# Altium PCB C2Sv0 - Adaptor.PcbDoc
Units mm, origin at the board's own origin, x right, y up, seen from the top; angles counter-clockwise.
Board outline 18.5 x 30 mm, 2 copper layers (Top Layer, Bottom Layer), stack 1.57 mm thick; 6 components, 13 nets, 74 pads, 24 vias.
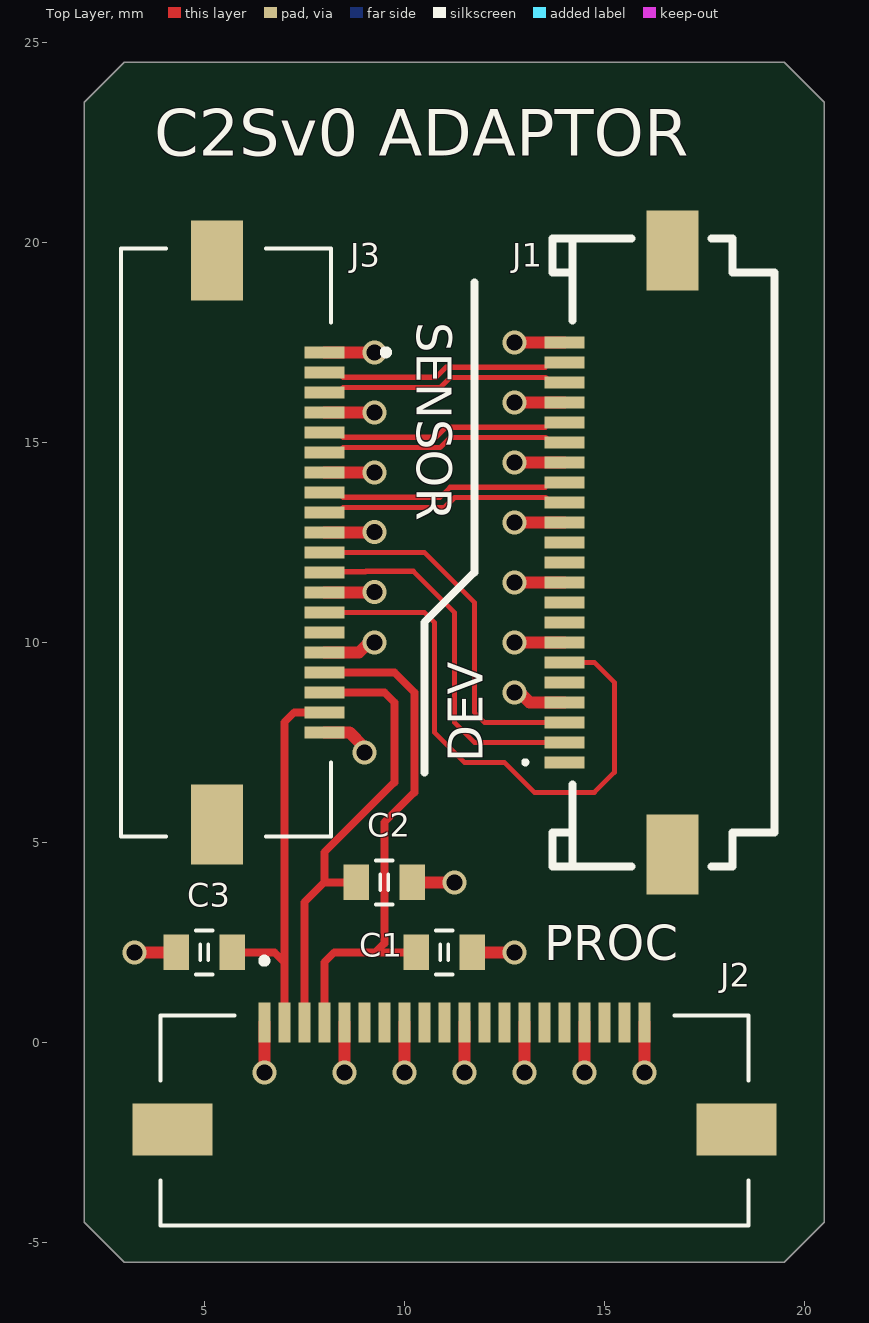
[diagram p0: Top Layer view]
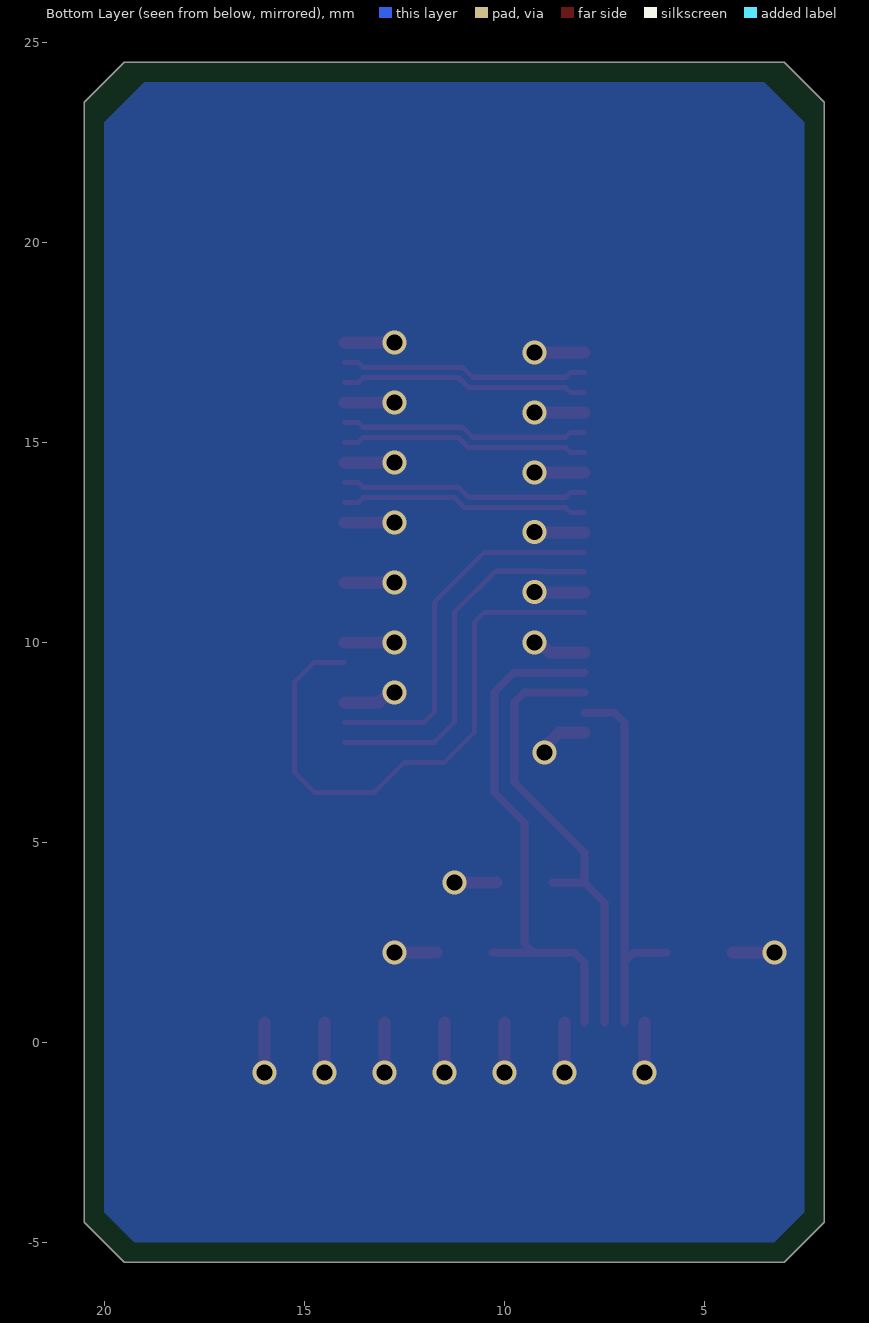
[diagram p1: Bottom Layer view, seen from below]
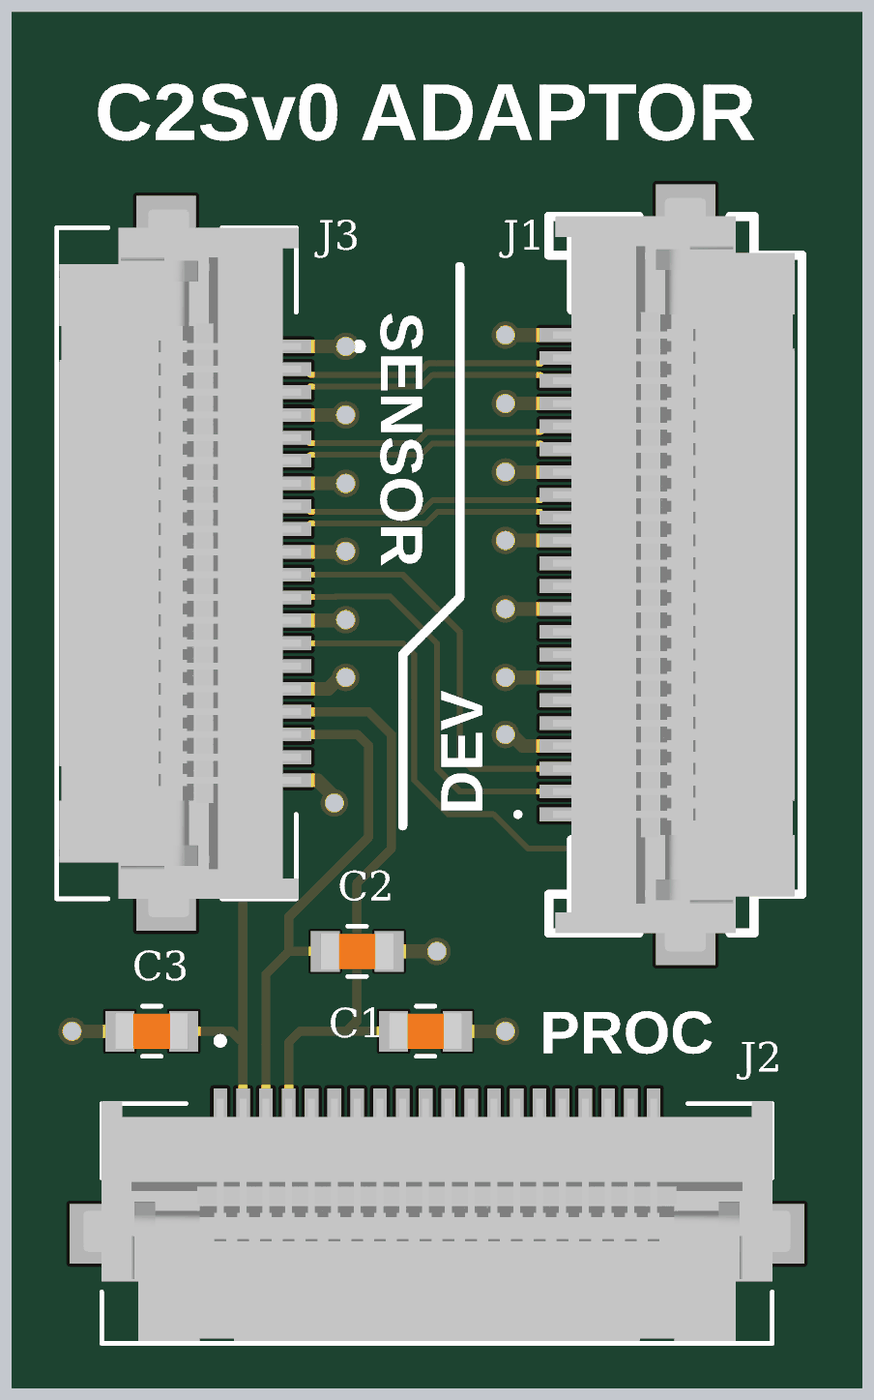
[diagram p2: 3D render of the assembled board from above, using the file's embedded part models]

## Layer stack, top to bottom
Top Solder: solder mask 0.0127, Solder Resist, Dk 3.8
Top Layer: signal copper 0.035
Dielectric: core 1.5, FR-4, Dk 4.5
Bottom Layer: signal copper 0.035
Bottom Solder: solder mask 0.0127, Solder Resist, Dk 3.8

## Board outline
2,-4.5 2,23.5 3,24.5 19.5,24.5 20.5,23.5 20.5,-4.5 19.5,-5.5 3,-5.5

## Design rules (kind name [scope] priority, off if disabled: settings)
BoardOutlineClearance [All] p1: gap=0.2 ignorepadtopadclearanceinfootprint=FALSE
Clearance [All] p1: gap=0.127 ignorepadtopadclearanceinfootprint=TRUE except(0.25: Arc-Hole Track-Hole SMDPad-Hole THPad-Hole Via-Hole Fill-Hole Poly-Hole Region-Hole Text-Hole)
ComponentClearance [All] p1: gap=0.127 collisioncheckmode=3 verticalgap=0.127 showdistances=TRUE
DiffPairsRouting [All] p1: maxlimit=0.254 minlimit=0.127 mostfreqgap=0.127 toplayer_minwidth=0.127 toplayer_maxwidth=25.4 toplayer_prefwidth=0.127 bottomlayer_minwidth=0.127 bottomlayer_maxwidth=25.4 bottomlayer_prefwidth=0.127 maxuncoupledlength=12.7
Height [All] p1: minheight=0 maxheight=1816.048 prefheight=12.7
HoleSize [All] p1: absolutevalues=TRUE maxlimit=6.3 minlimit=0.3 maxpercent=80.000 minpercent=20.000
HoleToHoleClearance [All] p1: gap=0.25 allowstackedmicrovias=FALSE
MinimumAnnularRing [All] p1: minimumring=0.076
MinimumSolderMaskSliver [All] p1: minsoldermaskwidth=0
PlaneClearance [All] p1: clearance=0.127
PlaneConnect PlaneConnectPowerPads [InPadClass('PowerPads')] p1: planeconnectstyle=Direct reliefexpansion=0.508 reliefentries=4 reliefconductorwidth=0.254 reliefairgap=0.254
PlaneConnect [All] p2: pad.planeconnectstyle=Relief pad.reliefexpansion=0.3 pad.reliefentries=4 pad.reliefconductorwidth=0.127 pad.reliefairgap=0.127 via.planeconnectstyle=Direct via.reliefexpansion=0.3 via.reliefentries=4 via.reliefconductorwidth=0.127 via.reliefairgap=0.127
PolygonConnect PolygonConnectPowerPads [All vs (InPadClass('PowerPads'))] p1: connectstyle=Direct reliefconductorwidth=0.254 reliefentries=4 polygonreliefangle="90 Angle" airgapwidth=0.254
PolygonConnect [All] p2: thpad.connectstyle=Relief thpad.reliefconductorwidth=0.127 thpad.reliefentries=4 thpad.polygonreliefangle="90 Angle" thpad.airgapwidth=0.127 smdpad.connectstyle=Relief smdpad.reliefconductorwidth=0.127 smdpad.reliefentries=4 smdpad.polygonreliefangle="90 Angle" smdpad.airgapwidth=0.127 via.connectstyle=Direct via.reliefconductorwidth=0.127 via.reliefentries=4 via.polygonreliefangle="90 Angle" via.airgapwidth=0.127
RoutingVias [All] p1: holewidth=0.3 width=0.6 viastyle="Through Hole" minholewidth=0.3 minwidth=0.6 maxholewidth=0.6 maxwidth=6.6
SilkToSilkClearance [All] p1: silktosilkclearance=0
SilkToSolderMaskClearance [IsPad] p1: minsilkscreentomaskgap=0.127 clearancetoexposedcopper=TRUE
SolderMaskExpansion SME_Via [IsVia] p1: expansion=0.102 istentingtop=TRUE
SolderMaskExpansion [All] p2: expansion=0.075 istentingtop=FALSE
SupplyNets "Schematic Supply Nets_3" [InNet('1V2')] p1: voltage=0.000
SupplyNets "Schematic Supply Nets_2" [InNet('GND')] p2: voltage=0.000
SupplyNets "Schematic Supply Nets_1" [InNet('1V8')] p3: voltage=0.000
SupplyNets "Schematic Supply Nets" [InNet('2V8')] p4: voltage=0.000
Width [All] p1: maxlimit=25.4 minlimit=0.127 preferedwidth=0.127 minimp=50.000000 maximp=50.000000 favimp=50.000000
20 further rules are at their usual default settings.

## Classes and differential pairs
differential pair STM_DATA1: +STM_DATA1_P -STM_DATA1_N
differential pair STM_DATA0: +STM_DATA0_P -STM_DATA0_N
differential pair STM_CLK: +STM_CLK_P -STM_CLK_N

## Components (designator, comment, footprint, x,y, rotation, side; value= is the part's Value field where it differs from the comment)
C1 "MCD-00237" C0603 11,2.25 r180 top value=0.1uF
C2 "MCD-00237" C0603 9.5,4 r180 top locked value=0.1uF
C3 "MCD-00237" C0603 5,2.25 r0 top value=0.1uF
J1 "505110-2296" 505110-2296 16.475,12.25 r90 top locked
J2 "505110-2096" 505110-2096 11.25,0 r0 top locked
J3 "505110-2096" 505110-2096 7.5,12.5 r270 top locked

## Footprints (in the part's own frame and the unit in brackets; to place one, negate y for a bottom-side part, rotate by r counter-clockwise, add the part's x,y. Pads: shape width x height; smd on the part's side, far side on the other; paste and mask are expansions set on the pad)
505110-2096 [mm]
  rect 0.3x1 smd: 1(-4.75,0.5) 2(-4.25,0.5) 3(-3.75,0.5) 4(-3.25,0.5) 5(-2.75,0.5) 6(-2.25,0.5) 7(-1.75,0.5) 8(-1.25,0.5) 9(-0.75,0.5) 10(-0.25,0.5) 11(0.25,0.5) 12(0.75,0.5) 13(1.25,0.5) 14(1.75,0.5) 15(2.25,0.5) 16(2.75,0.5) 17(3.25,0.5) 18(3.75,0.5) 19(4.25,0.5) 20(4.75,0.5)
  rect 2x1.3 smd: MP1(-7.05,-2.185) MP2(7.05,-2.185)
  silkscreen extent -7.35,-4.58 7.35,2.09, body extent -7.75,-4.53 7.75,0.77, height 1.9
505110-2296 [mm]
  rect 0.3x1 smd: 1(-5.25,2.475) 2(-4.75,2.475) 3(-4.25,2.475) 4(-3.75,2.475) 5(-3.25,2.475) 6(-2.75,2.475) 7(-2.25,2.475) 8(-1.75,2.475) 9(-1.25,2.475) 10(-0.75,2.475) 11(-0.25,2.475) 12(0.25,2.475) 13(0.75,2.475) 14(1.25,2.475) 15(1.75,2.475) 16(2.25,2.475) 17(2.75,2.475) 18(3.25,2.475) 19(3.75,2.475) 20(4.25,2.475) 21(4.75,2.475) 22(5.25,2.475)
  rect 2x1.3 smd: MP1(-7.55,-0.225) MP2(7.55,-0.225)
  silkscreen extent -7.85,-2.78 7.85,3.5, body extent -8.25,-2.62 8.25,2.68, height 1.9
C0603 [mm]
  rect 0.64x0.89 smd mask+0.05: 1(-0.7,0) 2(0.7,0)
  silkscreen extent -0.2,-0.55 0.2,0.55, body extent -0.9,-0.5 0.9,0.5, height 1.4

## Part data
C1 C2 C3: library part CMP-112-000001-1, "Capacitor, MLCC, 100nF, 6V3, X5R, 10%, 0603, T=0,8mm", Manufacturer=YAGEO, Manufacturer Part Number=CC0603KRX5R5BB104, Package=C0603, Component Type=Capacitors, ComponentLink1Description=Datasheet, ComponentLink1URL=http://tunmcdsvn.tun.st.com/Component_Datasheet_Library/Trunk/Capacitors/Yageo_Multilayer_capacitor_X5R_series_100pF_to_100uF, Design Item ID=MCD-00237, ECCN_EU=NEC, ECCN_US=EAR99, Internal_Part_Number=MCD-00237, Manufacturer_Part_Number=CC0603KRX5R5BB104, Part_Type=Capacitor, Pin Count=2, Provided_By=SUBCO, Source=MB1364.SCHLIB, Status=Released
J1: "Connector", Manufacturer_Name=Molex, Mouser Part Number=538-505110-2296, Datasheet Link=https://www.molex.com/pdm_docs/sd/5051102296_sd.pdf, Height=2.1mm, Manufacturer_Part_Number=505110-2296, Mouser Price/Stock=https://www.mouser.co.uk/ProductDetail/Molex/505110-2296?qs=IvjI65BR3TWV%252BB%252BT0zqCcg%3D%3D
J2 J3: "Connector", Manufacturer_Name=Molex, Mouser Part Number=538-505110-2096, Datasheet Link=https://componentsearchengine.com/Datasheets/1/505110-2096.pdf, Height=2.1mm, Manufacturer_Part_Number=505110-2096, Mouser Price/Stock=https://www.mouser.co.uk/ProductDetail/Molex/505110-2096?qs=IvjI65BR3TVK2gHWyfgM0A%3D%3D

## Via types
v1: diameter 0.6, hole 0.4, Top Layer to Bottom Layer, tented both sides, 24 vias

## Nets (pads, with @x,y where several pads share a name; then routed paths per layer and width w, separated by ;. In a path a pad name is that pad's centre, name@x,y a point inside that pad or via, vN(x,y) a via of type N, cw(c..) or ccw(c..) an arc to the next point about the centre after c; other vN are vias at no path point)
1V2: C3.2 J2.2 J3.19 | length 9.8
  Top Layer w0.2: C3.2@5.95,2.25 6.75,2.25 7,2 ; J2.2 7,2 ; J3.19 7.25,8.25 7,8 7,2
1V8: C2.2 J2.3 J3.18 | length 11.6
  Top Layer w0.2: J2.3 7.5,3.5 8,4 ; J3.18 9.5,8.75 9.75,8.5 9.75,6.5 8,4.75 8,4 ; C2.2 8,4
2V8: C1.2 J2.4 J3.17 | length 13.3
  Top Layer w0.2: J2.4 8,2 8.25,2.25 9.275,2.25 ; J3.17 9.75,9.25 10.25,8.75 10.25,6.25 9.5,5.5 9.5,2.475 9.275,2.25 ; C1.2 9.275,2.25
AR_RST: J1.6 J3.14 | length 14.6
  Top Layer w0.127: J3.14 10.5,10.75 10.75,10.5 10.75,7.75 11.5,7 12.5,7 13.25,6.25 14.75,6.25 15.25,6.75 15.25,9 14.75,9.5 J1.6
GND: C1.1 C2.1 C3.1 J1.4 J1.7 J1.10 J1.13 J1.16 J1.19 J1.22 J2.1 J2.5 J2.8 J2.11 J2.14 J2.17 J2.20 J3.1 J3.4 J3.7 J3.10 J3.13 J3.16 J3.20 | length 29.6
  Top Layer w0.127: v1(9,7.25) v1@9,7.378 ; v1@9.122,10 v1(9.25,10) ; v1@9.243,11.257 v1(9.25,11.264) ; v1@9.243,12.757 v1(9.25,12.763) ; v1(12.75,8.75) v1@12.878,8.75
  Top Layer w0.3: v1(3.25,2.25) C3.1 ; v1(6.5,-0.75) J2.1 ; J3.20 8.628,7.75 v1@9,7.378 ; J3.16 8.872,9.75 v1@9.122,10 ; J3.13 v1@9.236,11.25 ; J3.10 v1@9.236,12.75 ; J3.7 v1(9.25,14.25) ; J3.4 v1(9.25,15.75) ; J3.1 v1(9.25,17.25) ; v1(8.5,-0.75) J2.5 ; v1(10,-0.75) J2.8 ; C2.1 v1(11.25,4) ; v1(11.5,-0.75) J2.11 ; C1.1 v1(12.75,2.25) ; v1(12.75,10) J1.7 ; v1(12.75,11.5) J1.10 ; v1(12.75,13) J1.13 ; v1(12.75,14.5) J1.16 ; v1(12.75,16) J1.19 ; v1(12.75,17.5) J1.22 ; v1@12.878,8.75 13.128,8.5 J1.4 ; v1(13,-0.75) J2.14 ; v1(14.5,-0.75) J2.17 ; v1(16,-0.75) J2.20
SCLK: J1.3 J3.11 | length 9.4
  Top Layer w0.127: J3.11 10.5,12.25 11.75,11 11.75,8.25 12,8 J1.3
SDATA: J1.2 J3.12 | length 9.4
  Top Layer w0.127: J3.12 8.013,11.763 9.024,11.763 9.037,11.777 10.223,11.777 11.25,10.75 11.25,8 11.75,7.5 J1.2
STM_CLK_N: J1.15 J3.8 | length 6.2
  Top Layer w0.127: J3.8 8.35,13.75 8.473,13.627 10.897,13.627 11.147,13.877 13.527,13.877 13.65,14 J1.15
STM_CLK_P: J1.14 J3.9 | length 6.2
  Top Layer w0.127: J3.9 8.35,13.25 8.473,13.373 11.002,13.373 11.252,13.623 13.527,13.623 13.65,13.5 J1.14
STM_DATA0_N: J1.21 J3.2 | length 6.2
  Top Layer w0.127: J3.2 8.35,16.75 8.473,16.627 10.791,16.627 11.041,16.877 13.527,16.877 13.65,17 J1.21
STM_DATA0_P: J1.20 J3.3 | length 6.2
  Top Layer w0.127: J3.3 8.35,16.25 8.473,16.373 10.896,16.373 11.146,16.623 13.527,16.623 13.65,16.5 J1.20
STM_DATA1_N: J1.18 J3.5 | length 6.2
  Top Layer w0.127: J3.5 8.35,15.25 8.473,15.127 10.791,15.127 11.041,15.377 13.527,15.377 13.65,15.5 J1.18
STM_DATA1_P: J1.17 J3.6 | length 6.2
  Top Layer w0.127: J3.6 8.35,14.75 8.473,14.873 10.896,14.873 11.146,15.123 13.527,15.123 13.65,15 J1.17
pads on no net: J1.1 J1.5 J1.8 J1.9 J1.11 J1.12 J1.MP1 J1.MP2 J2.6 J2.7 J2.9 J2.10 J2.12 J2.13 J2.15 J2.16 J2.18 J2.19 J2.MP1 J2.MP2 J3.15 J3.MP1 J3.MP2

## Polygon pours and split planes (outlines as drawn)
GND on Bottom Layer "GND_L02_P000" (solid, pour order 0): 2.5,-4.25 3.25,-5 19.25,-5 20,-4.25 20,23 19,24 3.5,24 2.5,23

## Silkscreen, mask and mechanical layers (free items; w line width, h text height)
Top Overlay:
  lines w0.2: 10.5,6.75 10.5,10.5 11.75,11.75 11.75,19
  text "C2Sv0 ADAPTOR" at 3.75,21.774 h2
  text "SENSOR" at 10.018,18.003 h1.5 r270
  text "DEV" at 12.25,7 h1.5 r90
  text "PROC" at 13.5,1.768 h1.5
Board Shape:
  the board outline again, w0.15